# Altium PCB audioboard.PcbDoc
Units mm, origin at the board's own origin, x right, y up, seen from the top; angles counter-clockwise.
Board outline 36.6 x 54.15 mm, 2 copper layers (Top Layer, Bottom Layer); 25 components, 25 nets, 94 pads, 2 vias.
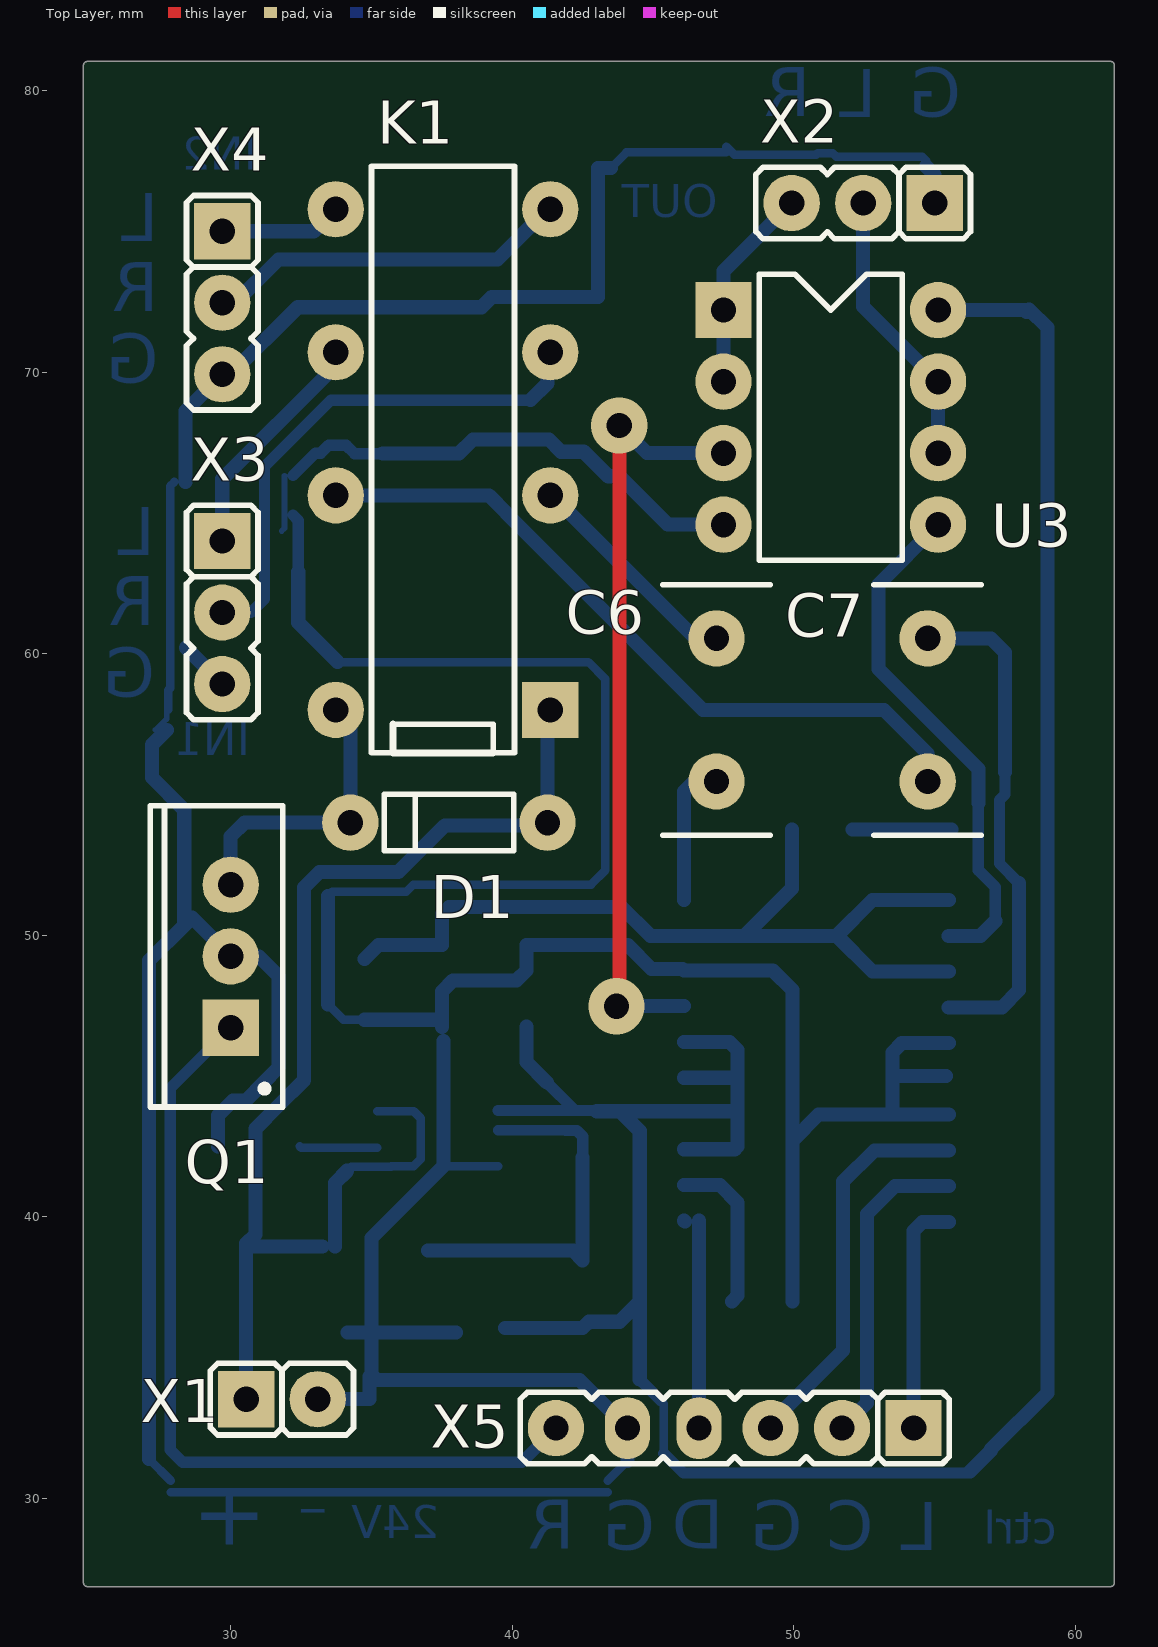
[diagram p0: Top Layer view]
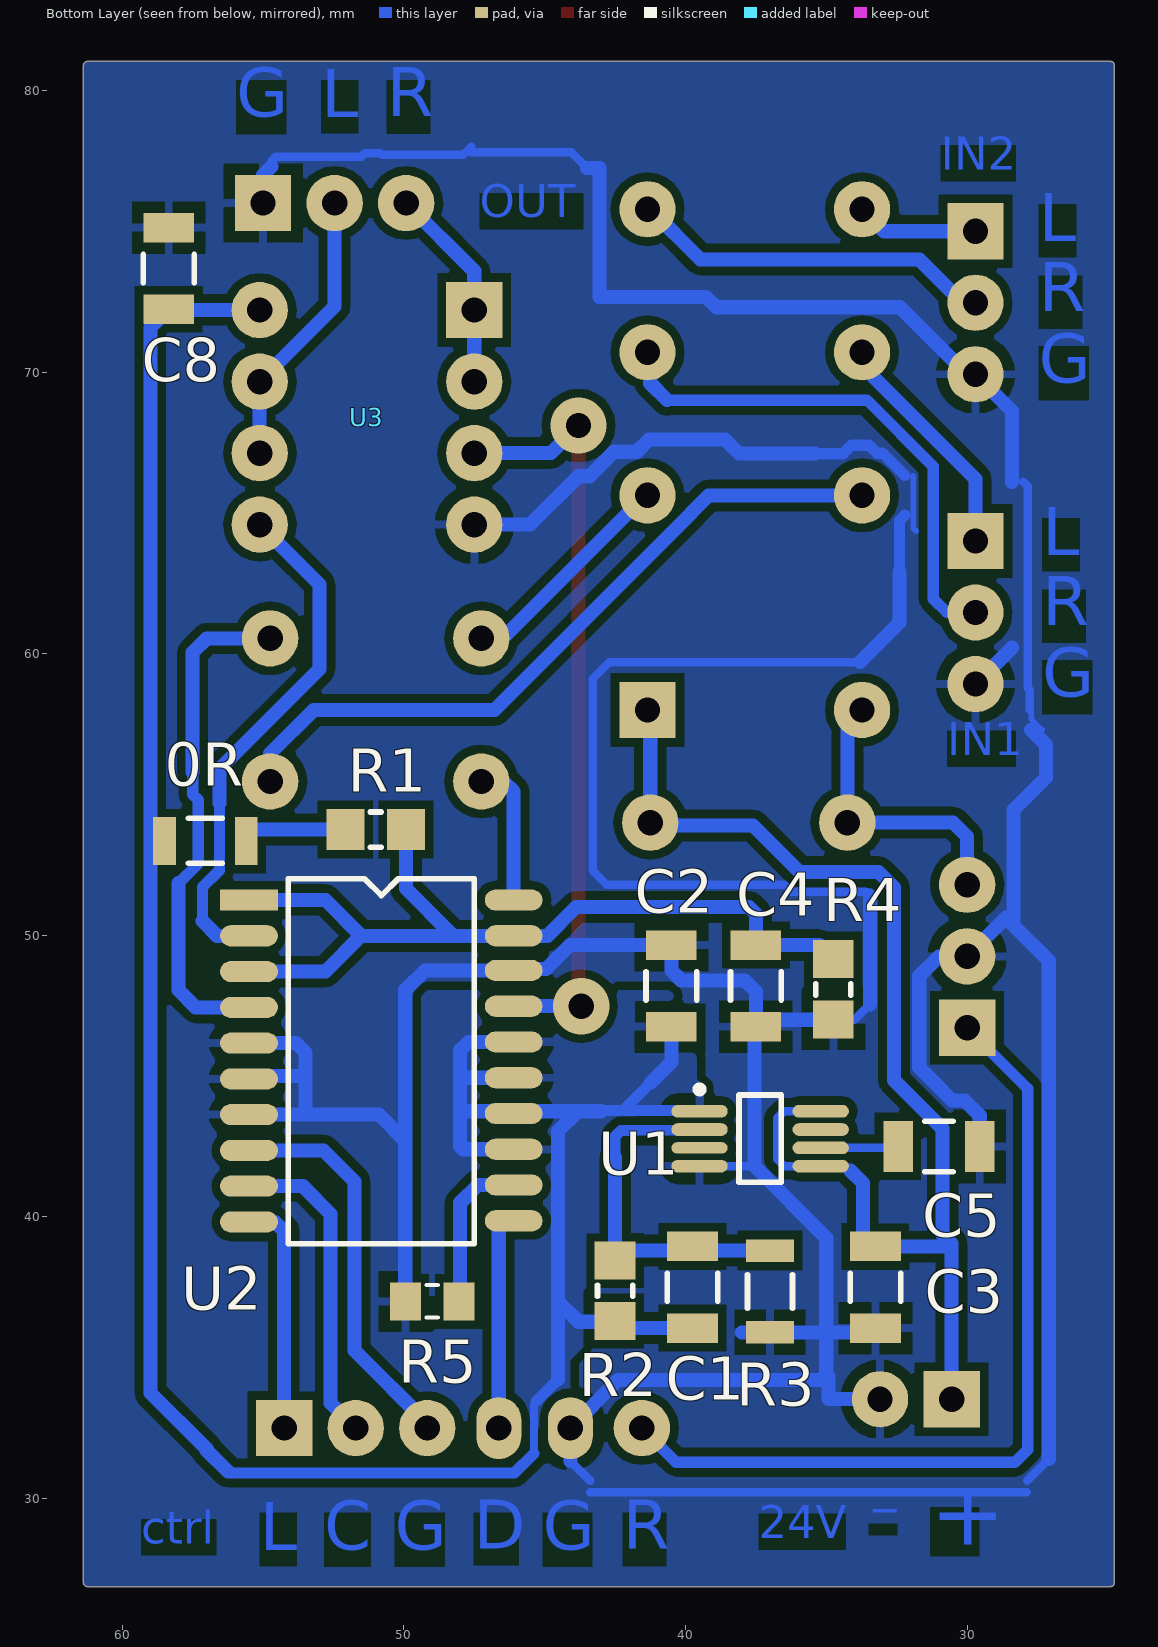
[diagram p1: Bottom Layer view, seen from below]

## Layer stack, top to bottom
Top Solder: solder mask 0.0102, Solder Resist, Dk 3.5
Top Layer: signal copper 0.0356
Dielectric 1: dielectric 0.32, FR-4, Dk 4.8
Bottom Layer: signal copper 0.0356
Bottom Solder: solder mask 0.0102, Solder Resist, Dk 3.5

## Board outline
24.9,26.873 cw(c24.9,27) 24.773,27 24.773,80.9 cw(c24.9,80.9) 24.9,81.027 61.25,81.027 cw(c61.25,80.9) 61.377,80.9 61.377,27 cw(c61.25,27) 61.25,26.873

## Design rules (kind name [scope] priority, off if disabled: settings)
Clearance Clearance_2 [InPolygon vs IsText] p1: gap=0
Clearance Clearance_1 [HasFootprint('MSOP-8') vs not InNet('GND')] p2: gap=0.2
Clearance [All] p3: gap=0.3
HoleSize [All] p1: absolutevalues=TRUE maxlimit=3 minlimit=0.6 maxpercent=80.000 minpercent=20.000
MinimumAnnularRing [All] p1: minimumring=0.3
PlaneClearance [All] p1: clearance=0.3
PlaneConnect [All] p1: planeconnectstyle=Relief reliefexpansion=0.5 reliefentries=4 reliefconductorwidth=0.3 reliefairgap=0.2
PolygonConnect [All] p1: connectstyle=Relief reliefconductorwidth=0.3 reliefentries=4 polygonreliefangle="90 Angle" airgapwidth=0.4
RoutingVias [All] p1: holewidth=0.9 width=2 viastyle="Through Hole" minholewidth=0.8 minwidth=1.6 maxholewidth=0.9 maxwidth=2
ShortCircuit ShortCircuit_1 [InPolygon vs IsText] p1: allowed=TRUE
ShortCircuit [All] p2: allowed=FALSE
SolderMaskExpansion [All] p1: expansion=0.102
UnpouredPolygon [All] p1: allowunpoured=FALSE
Width [All] p1: maxlimit=1 minlimit=0.2 preferedwidth=0.254
25 further rules are at their usual default settings.

## Classes and differential pairs
component class amplifier: C1 C2 C3 C4 C5 C6 C7 D1 K1 Q1 R1 R2 R3 R4 R5 U1 U2 U3 X1 X2 X3 X4 X5

## Components (designator, comment, footprint, x,y, rotation, side; value= is the part's Value field where it differs from the comment)
0R "Comment" RESC3216X07N 58.5,53.35 r180 bottom
C1 "10n" CAPC3216X17N 39.75,37.5 r270 bottom
C2 "10u" CAPC3216X17N 40.5,48.2 r270 bottom
C3 "10u" CAPC3216X17N 33.25,37.5 r90 bottom
C4 "10u" CAPC3216X17N 37.5,48.2 r90 bottom
C5 "10n" CAPC3216X17N 31,42.5 r0 bottom
C6 "1000u" RAD-0.2 47.25,58 r90 top
C7 "1000u" RAD-0.2 54.75,58 r270 top
C8 "10n" CAPC3216X17N 58.35,73.675 r270 bottom (schematic designator C1)
D1 "1N4048" DO-35 34.25,54 r0 top
K1 "DS2E-F-24V" DS2E-F-DC24V 41.35,58 r90 top
Q1 "IRF730" TO-220AB 30,49.25 r90 top
R1 "10K" RESC2012X06M 51,53.75 r0 bottom
R2 "10K" RESC2012X06M 42.5,37.375 r270 bottom
R3 "1K" RESC3216X07N 37,35.9 r90 bottom
R4 "10K" RESC2012X06M 34.75,48.075 r90 bottom
R5 "2K2" RESC2012X06N 49,37 r180 bottom
U1 "TPS7A4901" MSOP-8 39.5,43.75 r180 bottom
U2 "LM1972" SOIC-20_0127_7.5mm 55.5,51.25 r270 bottom
U3 "LF442CN" DIP-08_0254_0762_0420 47.5,72.2 r90 bottom
X1 "24V IN" CON_1X02S_0254 30.55,33.525 r0 top
X2 "Audio Out" CON_1X03S_0254 55,76 r180 top
X3 "Audio IN1" CON_1X03S_0254 29.7,64 r270 top
X4 "Audio IN2" CON_1X03S_0254 29.7,75 r270 top
X5 "Control (Arduino)" CON_1X06S_0254 54.25,32.5 r180 top

## Footprints (in the part's own frame and the unit in brackets; to place one, negate y for a bottom-side part, rotate by r counter-clockwise, add the part's x,y. Pads: shape width x height; smd on the part's side, far side on the other; paste and mask are expansions set on the pad)
CAPC3216X17N [mm] "Chip Kondensator 1206mil / 3216mm"
  rect 1.05x1.8 smd: 1(-1.45,0) 2(1.45,0)
  silkscreen extent -0.5,-0.9 0.5,0.9, body extent -1.7,-0.9 1.7,0.9, height 1.7
CON_1X02S_0254 [mm] "Stiften 1 Reihe 2 Pin 2.54mm"
  rect 2x2 hole 0.9: 1(0,0)
  round 2 hole 0.9: 2(2.54,0)
  silkscreen extent -1.27,-1.27 3.81,1.27, body extent -1.27,-1.27 3.81,1.27, height 9.5
CON_1X03S_0254 [mm] "Stiften 1 Reihe 3 Pin 2.54mm"
  rect 2x2 hole 0.9: 1(0,0)
  round 2 hole 0.9: 2(2.54,0) 3(5.08,0)
  silkscreen extent -1.27,-1.27 6.35,1.27, body extent -1.27,-1.27 6.35,1.27, height 9.5
CON_1X06S_0254 [mm] "Strip 100mil 6-Pin 1 Reihe"
  rect 2x2 hole 0.9: 1(0,0)
  round 2 hole 0.9: 2(2.54,0) 3(5.08,0) 6(12.7,0)
  oval 1.6x2.2 hole 0.9: 4(7.62,0) 5(10.16,0)
  silkscreen extent -1.27,-1.27 13.97,1.27, body extent -1.27,-1.27 13.97,1.27, height 9.5
DIP-08_0254_0762_0420 [mm] "DIL 8 Gehäuse 6.35mm"
  rect 2x2 hole 0.9: 1(0,0)
  round 2 hole 0.9: 2(-2.54,0) 3(-5.08,0) 4(-7.62,0) 5(-7.62,7.62) 6(-5.08,7.62) 7(-2.54,7.62) 8(0,7.62)
  body extent -8.86,-1.24 1.24,8.86, height 5
DO-35 [mm] "Diode DO-35 Glass Package"
  round 2 hole 0.9: 1(0,0) 2(7,0)
  silkscreen extent 1.2,-1 5.8,1, body extent 0.2,-0.99 6.7,1, height 2
DS2E-F-DC24V [mm] "Relay High-Sensitivity 24V, single-side stable, dual port"
  rect 2x2 hole 0.9: 1(0,0)
  round 2 hole 0.9: 4(7.62,0) 6(12.7,0) 8(17.78,0) 9(17.78,7.62) 11(12.7,7.62) 13(7.62,7.62) 16(0,7.62)
  silkscreen extent -1.52,1.27 19.3,6.35, body extent -1.52,-0.2 19.3,7.8, height 10
MSOP-8 [mm] "MSOP-8 8-Lead Mini Small Outline Package"
  oval 2x0.45 smd: 1(0,0) 2(0,-0.65) 4(0,-1.95) 5(4.3,-1.95) 6(4.3,-1.3) 7(4.3,-0.65) 8(4.3,0)
  oval 2x0.4 smd: 3(0,-1.3)
  silkscreen extent -0.13,-2.52 2.9,0.9, body extent 0.6,-2.52 3.7,0.58, height 1.1
RAD-0.2 [mm] "Radial Cap, Thru-Hole; 2 Leads; 0.2 in Pin Spacing"
  round 2 hole 0.9: 1(-2.54,0) 2(2.54,0)
  silkscreen extent -4.44,-1.91 4.44,1.91
RESC2012X06M [mm] "Chip Resistor, 2-Leads, Body 2.0x1.3mm, IPC Low Density"
  rect 1.35x1.45 smd: 1(-1.075,0) 2(1.075,0)
  silkscreen extent -0.2,-0.63 0.2,0.63, body extent -1.07,-0.67 1.08,0.67, height 0.6
RESC2012X06N [mm] "Chip Resistor, 2-Leads, Body 2.0x1.3mm, IPC Medium Density"
  rect 1.1x1.35 smd: 1(-0.95,0) 2(0.95,0)
  silkscreen extent -0.2,-0.58 0.2,0.58, body extent -1.08,-0.67 1.07,0.67, height 0.6
RESC3216X07N [mm] "Chip Widerstand 1206mil / 3216mm"
  rect 0.8x1.7 smd: 1(0,0) 2(2.9,0)
  silkscreen extent 0.85,-0.8 2.05,0.8, body extent -0.15,-0.85 3.05,0.85, height 0.65
SOIC-20_0127_7.5mm [mm] "SO 20 Gehäuse 7.5mm"
  rect 0.75x2.05 smd: 1(0,0)
  oval 0.75x2.05 smd: 2(1.27,0) 3(2.54,0) 4(3.81,0) 5(5.08,0) 6(6.35,0) 7(7.62,0) 8(8.89,0) 9(10.16,0) 10(11.43,0) 11(11.39,9.4) 12(10.12,9.4) 13(8.85,9.4) 14(7.58,9.4) 15(6.31,9.4) 16(5.04,9.4) 17(3.77,9.4) 18(2.5,9.4) 19(1.27,9.4) 20(0,9.4)
  silkscreen extent -0.75,1.4 12.2,8, body extent -0.75,0.95 12.2,8.45, height 2.8
TO-220AB [mm] "TO, Thru-Hole, Vertical, Heatsink Mounted; 3 In-Line Leads; Pitch 2.54 mm"
  rect 2x2 hole 0.9: 1(-2.54,0)
  round 2 hole 0.9: 2(0,0) 3(2.54,0)
  silkscreen extent -5.35,-1.85 5.35,2.85, body extent -5.4,-1.9 5.4,2.9, height 19.3

## Part data
C1 C5 C8: library part C1206C103K, "CAP CER 10NF 50V 10% X7R 1206"
C2 C3 C4: library part C1206C104K, "CAP CER 100NF 50V 10% X7R 1206"
C6 C7: library part CA-1CM102, "CAP ALUM 1000UF 16V 20% RADIAL"
D1: "275 Amp Avg Power Silicon Rectifier Diode"
K1: library part DS2E-F-DC24V, "Relay 24V"
Q1: "HEXFET N-Channel Power MOSFET"
R1 R2 R4: library part RC0805FR-0710KL, "RES 10K OHM 1/8W 1% 0805 SMD"
R3: library part RC1206FR-071KL, "RES 1.00K OHM 1/4W 1% 1206 SMD"
R5: library part RC0805FR-072K2L, "RES 2.20K OHM 1/8W 1% 0805 SMD"
U1: "IC, ADJ LDO REG, 1.2V-33V, 0.15A, MSOP-8"
U3: "LF442 Dual Low Power JFET Input Operational Amplifier"
X1: library part HDR1x02, "Stecker 2-Pin"
X2 X3 X4: library part HDR1x03, "Stecker 3-Pin"
X5: library part HDR1x06, "Stecker 4-Pin"

## Via types
v1: diameter 2, hole 0.9, Top Layer to Bottom Layer, 2 vias

## Nets (pads, with @x,y where several pads share a name; then routed paths per layer and width w, separated by ;. In a path a pad name is that pad's centre, name@x,y a point inside that pad or via, vN(x,y) a via of type N, cw(c..) or ccw(c..) an arc to the next point about the centre after c; other vN are vias at no path point)
24V: C3.2 D1.2 K1.1 U1.5 U1.8 X1.1 | length 44
  Bottom Layer w0.3: 34.138,41.638 34.275,41.775 U1.5@35.7,41.775 ; U1.8 36.5,43.75 36.75,43.5 36.75,42.05 36.5,41.8 U1.5@35.7,41.8
  Bottom Layer w0.5: X1.1 30.55,38.95 ; C3.2 30.55,38.95 ; C3.2@33.7,38.95 33.7,41.2 34.138,41.638 ; D1.2@41.25,53.903 37.603,53.903 35.95,52.25 33.15,52.25 32.6,51.7 32.6,44.85 31.7,43.95 31.697,43.95 30.875,43.128 30.875,39.375 30.55,39.05 30.55,38.95 ; D1.2 K1.1@41.25,58
+13V: 0R.1 0R.2 C1.2 C2.2 C8.2 R1.2 R2.2 U1.1 U2.13 U2.14 U2.15 U2.16 U3.8 | length 100
  Bottom Layer w0.3: 45.29,33.46 45.38,33.37 45.38,31.599
  Bottom Layer w0.4: U1.1@39.5,43.775 42.225,43.775 ; 41.225,44.775 42.225,43.775 ; 43,43.775 42.225,43.775 ; 44.525,34.225 45.29,33.46 ; 45.38,31.599 46.079,30.9 56.2,30.9 56.25,30.95
  Bottom Layer w0.5: C1.2 42.5,36.05 42.725,36.275 43.8,36.275 44.525,37 ; C2.2 40.5,45.5 41.225,44.775 ; 43,43.75 43.825,43.75 ; 44.525,34.225 44.525,37 ; U2.13 47.9,42.4 48,42.5 48,43.75 ; U2.15 47.94,44.94 48,45 ; U2.16 47.71,46.21 48,45.92 48,45 ; R1.2 0R.2@55.6,53.75 ; U3.8 58.2,72.2 C8.2@58.262,72.137 ; 56.25,30.95 57,31.7 57,31.75 59,33.75 59,71.575 C8.2 ; 43.825,43.75 44.525,43.05 44.525,37 ; 43.825,43.75 48,43.75 ; 48,43.75 48,45
GND: C2.1 C3.1 C4.1 C5.1 C8.1 Q1.2 R3.1 R4.1 R5.1 U1.4 U2.5 U2.6 U2.7 U2.18 U3.4 X1.2 X2.1 X3.3 X4.3 X5.5 | length 235
  Bottom Layer w0.2: 27.329,57.293 27.341,57.293 27.725,57.677 27.725,57.95 27.775,58 ; 31.81,64.353 31.91,64.453 31.91,66.321
  Bottom Layer w0.3: 27.1,31.4 27.872,30.628 ; 27.775,58 27.775,58.7 27.85,58.775 27.85,65.95 28,66.1 ; 27.872,30.228 43.383,30.228 ; 33.45,47.55 34,47 R4.1 ; 33.45,51.4 33.6,51.55 36.24,51.55 36.49,51.8 42.8,51.8 43.3,52.3 43.3,59.1 42.7,59.7 33.8,59.7 ; 37.55,41.8 U1.4 ; 43.383,30.628 44.09,31.335 ; 43.5,77.25 44.05,77.8 47.6,77.8 ; 47.6,78 47.882,77.718 50.786,77.718 50.845,77.777 51.377,77.777 51.503,77.65 54.55,77.65 54.7,77.5
  Bottom Layer w0.4: 32.21,64.919 32.4,64.729 32.4,62.9 ; 32.21,66.321 33.009,67.12 33.2,67.12 33.48,67.4 34.1,67.4 34.4,67.1 35.4,67.1
  Bottom Layer w0.5: 27.1,31.4 27.1,49.1 28.35,50.35 ; 27.729,57.293 27.2,56.764 27.2,55.6 28.35,54.45 28.35,50.35 ; 28.4,66.1 28.4,68.62 X4.3 ; 28.41,60.21 X3.3 ; C5.1 29.55,43.6 30.087,44.137 30.538,44.137 31.163,44.763 31.7,45.3 31.7,48.55 31,49.25 Q1.2 28.625,50.625 28.35,50.35 ; X4.3@30,69.92 32.38,72.3 38.901,72.3 39.271,72.67 43.05,72.67 43.05,77.25 43.5,77.25 ; 32.4,62.9 32.4,61.1 33.8,59.7 ; X1.2 34.925,33.525 34.925,34.325 35,34.4 ; 33.45,47.55 33.45,51.4 ; C3.1@34.15,35.9 38,35.9 ; R4.1 C4.1@37.25,47 ; 35.4,67.1 38.1,67.1 38.6,67.6 41.3,67.6 41.73,67.17 42.538,67.17 43.408,66.3 43.8,66.3 45.52,64.58 U3.4 ; C4.1 37.5,48 37.9,48.4 40.15,48.4 40.5,48.75 C2.1 44.1,49.65 44.95,48.8 46.05,48.8 U2.18 49.25,48.75 49.95,48.05 49.95,42.7 ; C4.1@37.55,46.25 37.55,41.8 35,39.25 35,34.4 ; 44.09,31.335 X5.5 42.39,34.2 35.2,34.2 35,34.4 ; R5.1 49.95,42.7 ; 54.7,77.3 55,77 X2.1 ; U2.6@55.4,45 53.5,45 ; U2.7 53.5,43.63 ; U2.5 53.83,46.17 53.5,45.84 53.5,45 ; 49.95,42.7 50.88,43.63 53.5,43.63 ; 53.5,43.63 53.5,45
NetC1_1: C1.1 R2.1 R3.2 U1.2 | length 13.5
  Bottom Layer w0.38: U1.2@39.5,43.07 42.25,43.07 ; 41.9,43.06 42.29,43.06
  Bottom Layer w0.4: 42.29,43.06 42.5,42.85 42.5,42.1
  Bottom Layer w0.5: R3.2 42.15,38.8 R2.1 42.5,42.1
NetC5_2: C5.2 U1.6 | length 2.8
  Bottom Layer w0.3: C5.2 32.5,42.45 U1.6
NetC6_1: C6.1 U2.20 | length 5.1
  Bottom Layer w0.5: U2.20 46.1,55.1 46.46,55.46 C6.1
NetC6_2: C6.2 K1.4 | length 8.1
  Bottom Layer w0.5: K1.4@41.25,65.62 41.42,65.62 46.5,60.54 C6.2
NetC7_1: C7.1 U2.4 | length 18.1
  Bottom Layer w0.4: 57.5,55.8 57.5,55 57.3,54.8 57.3,52.547 58,51.847
  Bottom Layer w0.5: C7.1 57,60.54 57.5,60.04 57.5,55.8 ; U2.4 57.39,47.44 58,48.05 58,51.847
NetC7_2: C7.2 K1.13 | length 25.9
  Bottom Layer w0.5: K1.13@33.63,65.62 K1.13@33.68,65.57 ; K1.13 39.18,65.62 39.8,65 39.8,64.978 46.778,58 53.2,58 54.75,56.45 C7.2
NetD1_1: D1.1 K1.16 Q1.3 | length 10.4
  Bottom Layer w0.5: Q1.3 30,53.5 30.5,54 D1.1 34.25,57.38 K1.16@33.63,58
NetK1_6: K1.6 X3.2 | length 18.8
  Bottom Layer w0.4: X3.2 30.72,61.46 31.2,61.94 31.2,66.639 33.561,69 40.65,69
  Bottom Layer w0.5: 40.65,69 41.25,69.6 K1.6@41.25,70.7
NetK1_8: K1.8 X4.2 | length 12.9
  Bottom Layer w0.5: X4.2 30.16,72.46 31.7,74 39.47,74 K1.8@41.25,75.78
NetK1_9: K1.9 X4.1 | length 4.1
  Bottom Layer w0.5: X4.1@30,75 32.95,75 K1.9
NetK1_11: K1.11 X3.1 | length 8.3
  Bottom Layer w0.5: X3.1 29.7,66.2 33.63,70.13 K1.11@33.63,70.7
NetQ1_1: Q1.1 X5.6 | length 30.3
  Bottom Layer w0.4: Q1.1 27.85,44.56 27.85,31.731 28.295,31.286 31.959,31.286 31.967,31.278 31.975,31.286 40.336,31.286 X5.6
NetR5_2: R5.2 U2.12 | length 5.7
  Bottom Layer w0.5: U2.12 47.37,41.13 48,40.5 48,37.2 R5.2@47.8,37
NetU2_2: U2.2 U3.5 | length 18.5
  Bottom Layer w0.4: 56.55,54.7 56.55,52.307 57.15,51.707 57.15,50.5
  Bottom Layer w0.5: U3.5 53,62.46 53,59.45 56.55,55.9 56.55,54.7 ; U2.2 56.63,49.98 57.15,50.5
NetU2_8: U2.8 X5.3 | length 14
  Bottom Layer w0.5: X5.3 49.17,32.67 51.75,35.25 51.75,41.25 52.86,42.36 U2.8
NetU2_9: U2.9 X5.2 | length 11.3
  Bottom Layer w0.5: X5.2 52.6,33.39 52.6,40.1 53.59,41.09 U2.9
NetU2_10: U2.10 X5.1 | length 8.4
  Bottom Layer w0.5: X5.1 54.25,39.5 54.57,39.82 U2.10
NetU2_11: U2.11 X5.4 | length 7.4
  Bottom Layer w0.5: U2.11 U2.11@46.13,39.83 ; X5.4 U2.11@46.63,39.86
NetU2_17: U2.17 U3.3 | length 27.7
  Top Layer w0.5: v1@43.25,48 43.8,47.45 v1(43.8,68.1)
  Bottom Layer w0.5: v1(43.8,68.1) 44.78,67.12 U3.3 ; v1@43.9,47.48 U2.17
  other v1: 43.7,47.48
NetU3_1: U3.1 U3.2 X2.3 | length 7.3
  Bottom Layer w0.5: U3.2 U3.1 47.5,73.58 X2.3
NetU3_6: U3.6 U3.7 X2.2 | length 10
  Bottom Layer w0.5: X2.2 52.46,72.32 U3.7 U3.6
VGND: C4.2 R1.1 R4.2 U2.1 U2.3 U2.19 | length 32.1
  Bottom Layer w0.5: R4.2 35.25,49.65 C4.2 37.5,50.75 37.75,51 43.881,51 44.901,49.98 U2.19 48.25,49.98 ; R1.1 49.925,51.655 48.25,49.98 ; U2.3 52.79,48.71 51.52,49.98 ; U2.1 52.79,51.25 51.52,49.98 ; 48.25,49.98 51.52,49.98
pads on no net: U1.3 U1.7

## Polygon pours and split planes (outlines as drawn)
GND on Bottom Layer "GND" (solid, pour order 12): 24.9,26.873 cw(c24.9,27) 24.773,27 24.773,80.9 cw(c24.9,80.9) 24.9,81.027 61.25,81.027 cw(c61.25,80.9) 61.377,80.9 61.377,27 cw(c61.25,27) 61.25,26.873
+13V on Bottom Layer "13V" (solid, pour order 10): 49.95,48.05 40.45,48.05 40.4,48 40,48 39.5,47.5 39.6,47.4 39.6,44.9 38.7,44 38.7,43.6 41.75,43.6 42.5,42.85 42.6,42.75 42.6,35.6 43.4,35.6 44,35 44.09,34.91 44.09,32.5 46.63,32.5 46.63,35.83 48,37.2 49.55,37.2 49.95,37.6 49.95,47.9

## Other copper
Bottom Layer:
  text "R" at 50.6,78.5 h3
  text "L" at 52.943,78.471 h3
  text "G" at 55.95,78.471 h3
  text "IN2" at 30.942,76.8 h2
  text "OUT" at 47.3,75.1 h2
  text "L" at 27.45,74.075 h3
  text "R" at 27.45,71.566 h3
  text "G" at 27.45,69.025 h3
  text "L" at 27.325,62.925 h3
  text "R" at 27.325,60.416 h3
  text "G" at 27.325,57.875 h3
  text "IN1" at 30.7,56 h2
  text "24V" at 37.4,28.2 h2
  text "-" at 33.5,28 h4
  text "ctrl" at 59.325,28 h2
  text "R" at 42.225,27.629 h3
  text "D" at 47.514,27.629 h3
  text "+" at 31.3,27.6 h4
  text "G" at 45.074,27.6 h3
  text "G" at 50.322,27.6 h3
  text "C" at 52.829,27.6 h3
  text "L" at 55.125,27.6 h3

## Silkscreen, mask and mechanical layers (free items; w line width, h text height)
Mechanical 1:
  lines w0.254: 24.9,27 61.25,27 61.25,80.9 24.9,80.9 24.9,27